# Altium PCB Power_Board_Gan_Cuk.PcbDoc (part 4 of 4)
Units mil, origin at the board's own origin, x right, y up, seen from the top; angles counter-clockwise.
Board outline 9910 x 8913.25 mil, 5 copper layers (Top Layer, Middle 1, HF Layer, Middle 4, Bottom Layer), stack 37.051 mil thick; 394 components, 188 nets, 1156 pads, 1424 vias.
Unrouted connection lines stored in the file: 6.
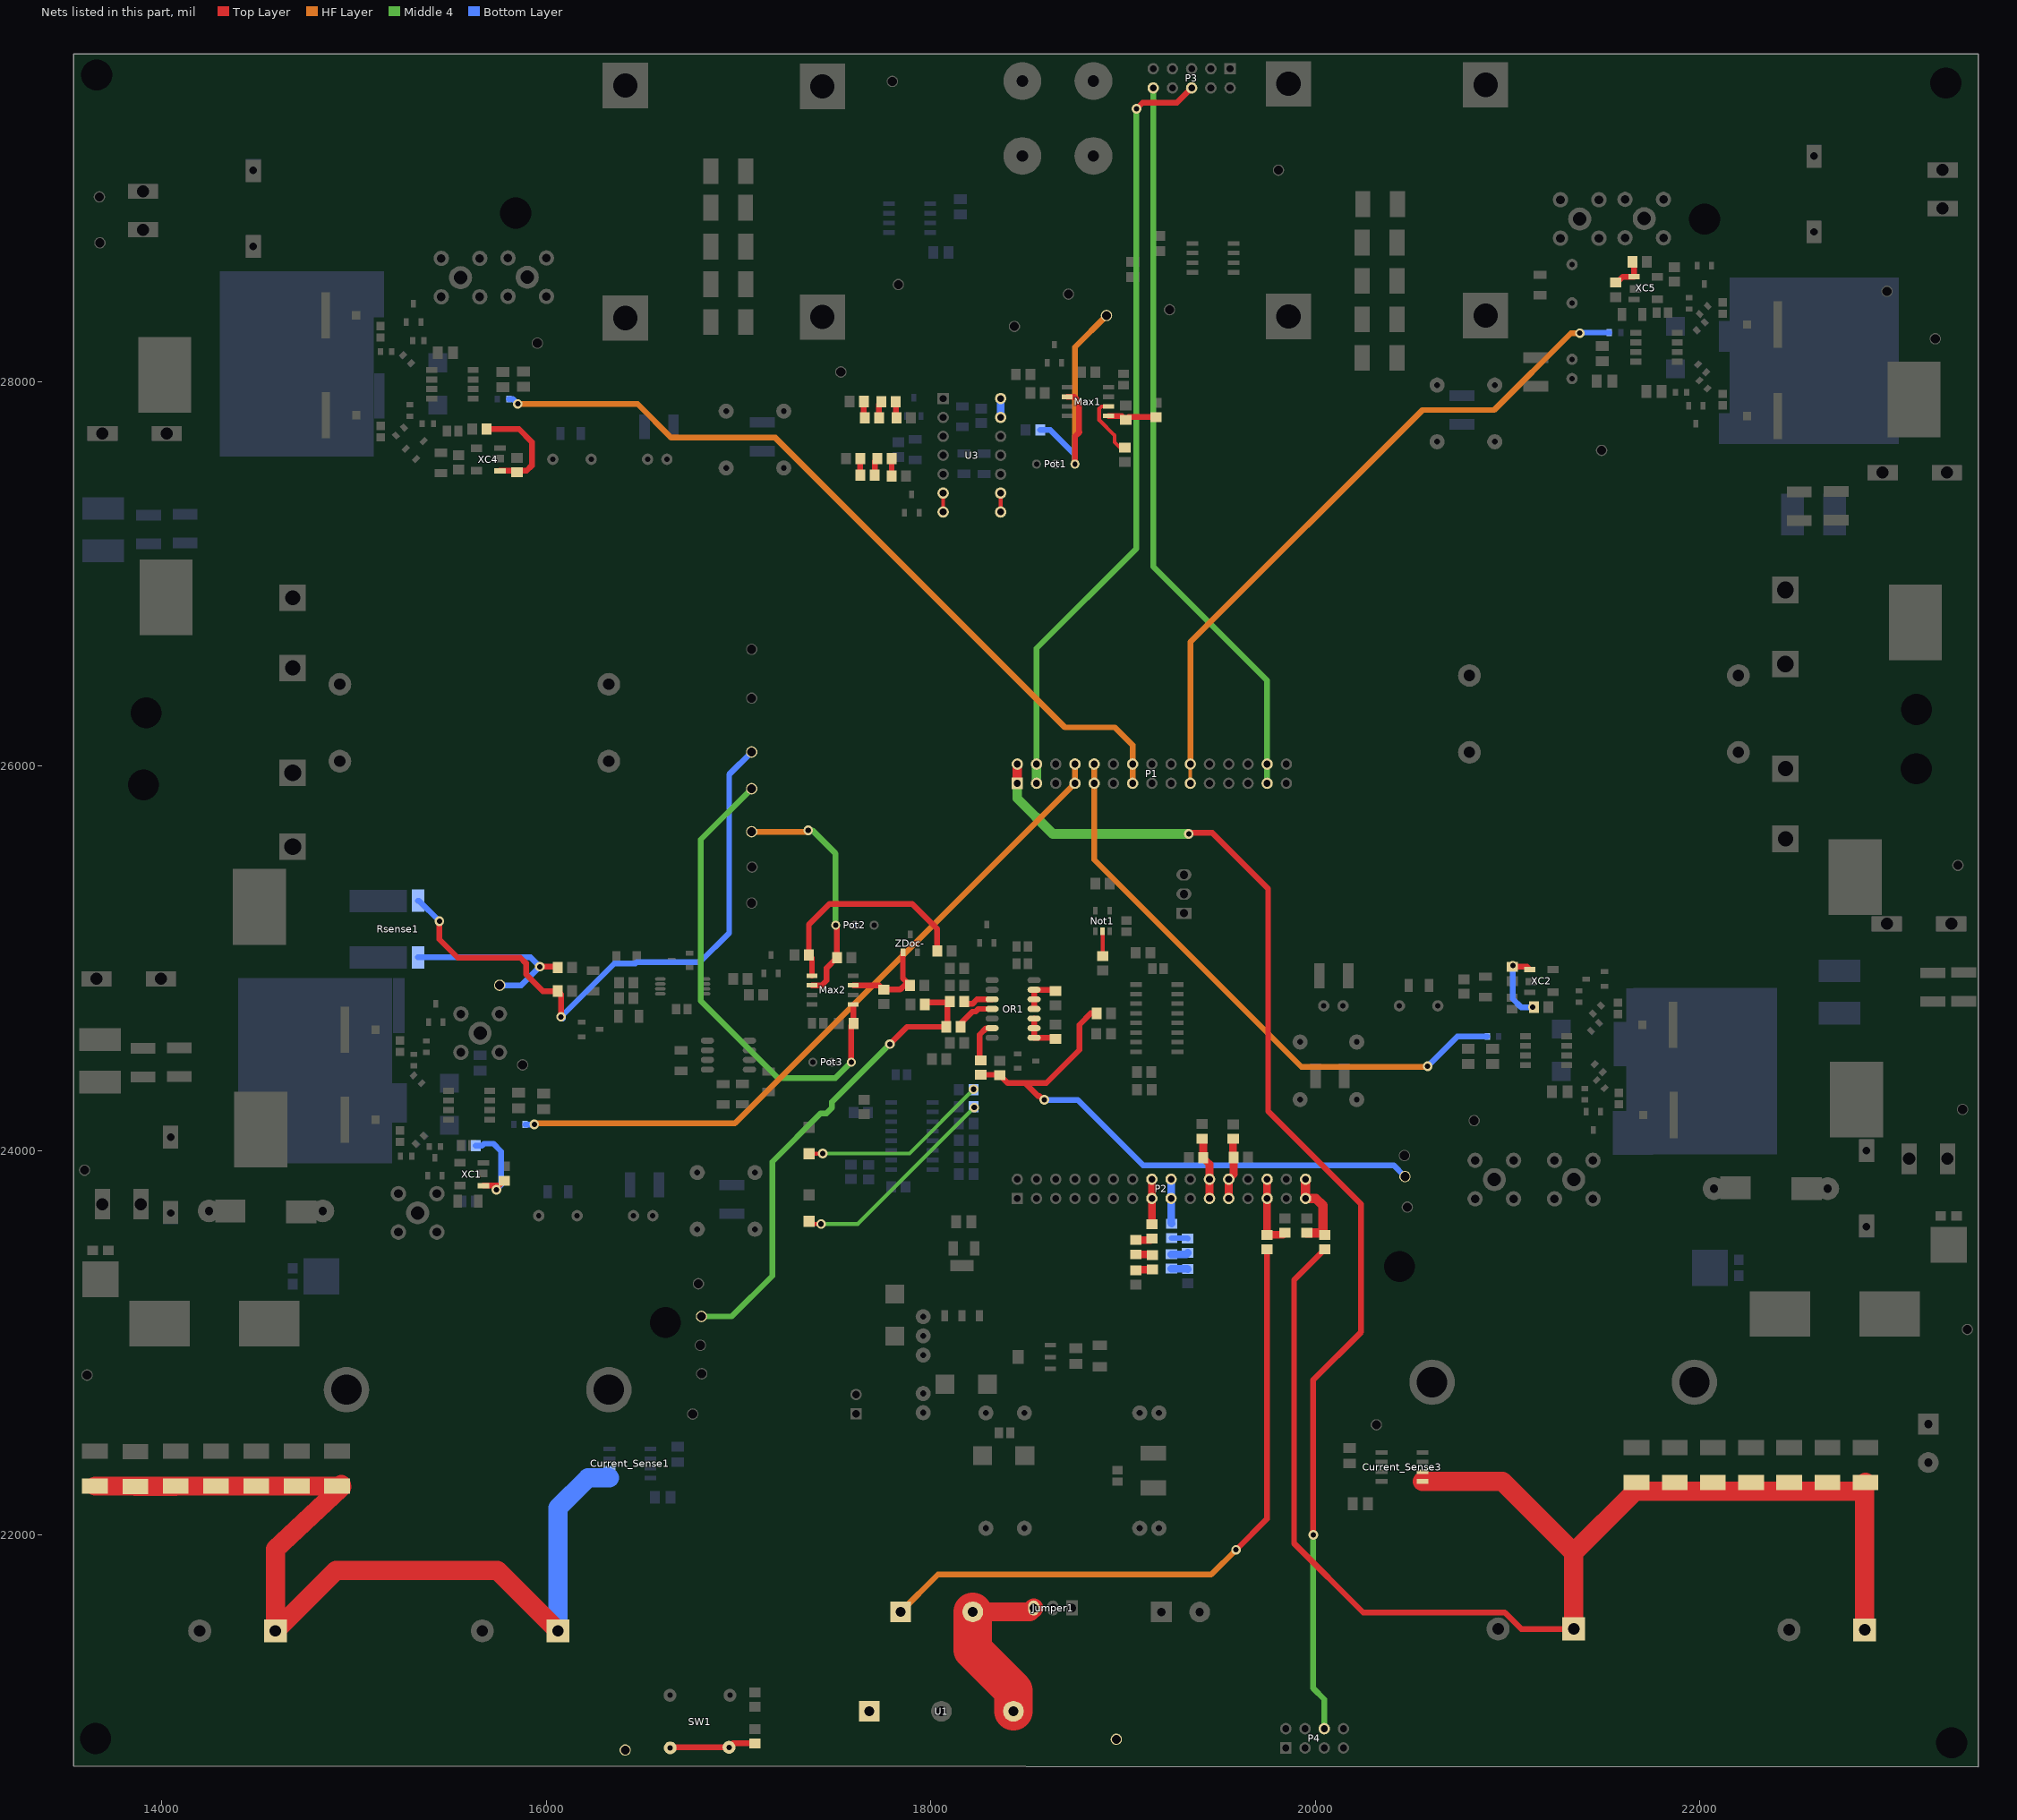
[diagram p7: the nets of this part, all layers, seen from the top]

## Via types
v1: diameter 15, hole 12, Top Layer to Bottom Layer, 976 vias
v2: diameter 50, hole 28, Top Layer to Bottom Layer, 343 vias
v3: diameter 35, hole 20, Top Layer to Bottom Layer, 74 vias
v4: diameter 35, hole 25, Top Layer to Bottom Layer, 30 vias
v5: diameter 100, hole 50, Top Layer to Bottom Layer, 1 vias

## Nets (pads, with @x,y where several pads share a name; then routed paths per layer and width w, separated by ;. In a path a pad name is that pad's centre, name@x,y a point inside that pad or via, vN(x,y) a via of type N, cw(c..) or ccw(c..) an arc to the next point about the centre after c; other vN are vias at no path point) (continued)
NetMax1_2: Max1.2 Pot1.1 R55.1 TP32.1 | length 1531.2
  Top Layer w30: Max1.2@18709.73,27920.98 18747.02,27920.98 18771,27897 18771,27737.6 18772.6,27736 18750,27713.4 Pot1.1@18750,27571
  HF Layer w30: Pot1.1@18750,27571 18750,28180 TP32.1@18914,28344
  Bottom Layer w30: R55.1@18568.4,27748 18621,27748 18750,27619 Pot1.1@18750,27571
NetMax1_5: Max1.5 R51.1 R73.2 | length 262.4
  Top Layer w30: Max1.5@18924.3,27820.98 18993.61,27820.98 R73.2@19014,27800.6 19029,27815.6 R51.1@19172,27815.6
NetMax1_6: Max1.6 Rl1.2 | length 327
  Top Layer w20: Max1.6@18924.3,27870.98 18887.98,27870.98 18875.76,27858.76 18875.76,27800.24 18956,27720 18956,27684 18983.6,27656.4 Rl1.2@19010,27656.4
NetMax2_1: Max2.1 R56.2 Rdev2.1 | length 1153.3
  Top Layer w30: Max2.1@17381.73,24908.98 17381.73,25000.67 Rdev2.1@17365.4,25017 17365.4,25174.4 17474,25283 17902,25283 18033.6,25151.4 R56.2@18033.6,25038
NetMax2_2: Max2.2 Pot2.1 R74.1 TP43.1 | length 1261
  Top Layer w30: Max2.2@17381.73,24858.98 17431.98,24858.98 17457,24884 17457,24948.4 R74.1@17511.6,25003 17511.6,25165.4 Pot2.1@17505,25172
  Middle 4 w30: v2(17362,25665) 17384,25665 17505,25544 Pot2.1@17505,25172
  HF Layer w30: TP43.1@17068,25658 17355,25658 v2(17362,25665)
NetMax2_5: Max2.5 Pot3.1 R78.1 TP44.1 | length 2502
  Top Layer w30: Pot3.1@17586,24459 17586,24649.6 R78.1@17597.4,24661 17597.4,24757.88 Max2.5@17596.3,24758.98
  Middle 4 w30: TP44.1@17068,25882 16803,25617 16803,24778 17204,24377 17504,24377 Pot3.1@17586,24459
NetMax2_7: Max2.7 R66.2 Rdev.2 ZDoc-.1 | length 502.1
  Top Layer w30: Max2.7@17596.3,24858.98 17732.42,24858.98 Rdev.2@17755,24836.4 17840.4,24836.4 17862,24858 R66.2@17892.6,24858 17854.6,24896 ZDoc-.1@17854.6,25029.76
NetNot1_2: Not1.2 NOTR.1 | length 129.9
  Top Layer w20: Not1.2@18893,25139.88 18894,25138.88 NOTR.1@18894,25010.4
NetOC_1: OC.1 R77.2 | length 1116.9
  Top Layer w20: OC.1@17366,23631.2 17380.2,23617 v2(17429,23617)
  Middle 4 w20: v2(17429,23617) 17620,23617 v2(18226,24223)
NetOR1_3: OR1.3 Roc1tot.1 | length 155.3
  Top Layer w30: Roc1tot.1@18173.4,24762 18216,24762 18240,24786 OR1.3@18318.75,24786
NetOR1_4: OR1.4 R71.1 | length 220.5
  Top Layer w30: R71.1@18156.4,24643 18155.4,24644 18146.4,24653 18155.2,24660.2 18217,24722 18232.57,24722 18246.57,24736 OR1.4@18318.75,24736
NetOR1_6: OR1.6 Rlatch1.1 | length 214.9
  Top Layer w30: Rlatch1.1@18260,24468.4 18254,24474.4 18254,24602 18288,24636 OR1.6@18318.75,24636
NetOR1_8: OR1.8 OR1.9 OR1.10 R92.1 | length 214.4
  Top Layer w30: OR1.10@18537.25,24686 OR1.9@18537.25,24636 OR1.8@18537.25,24586 18642.6,24586 R92.1@18649,24579.6
NetOR1_11: OR1.11 OR1.12 OR1.13 R91.1 | length 214.5
  Top Layer w30: OR1.11@18537.25,24736 OR1.12@18537.25,24786 OR1.13@18537.25,24836 18642.4,24836 R91.1@18649,24829.4
NetOV_1: OV.1 R75.2 | length 995.1
  Top Layer w20: OV.1@17367,23982.1 17436.1,23982.1 v2(17438,23984)
  Middle 4 w20: v2(17438,23984) 17889,23984 v2(18223,24318)
NetP1_1: P1.1 P1.2 P4.6 | length 6386.5
  Top Layer w30: v2(19342,25647) 19348,25653 19464,25653 19755,25362 19755,24204 20239,23720 20239,23055 19988,22804 19988,21997 v2(19990,21999)
  Top Layer w50: P1.1@18450,25910 P1.2@18450,26010
  Middle 4 w30: v2(19990,21999) 19990,21201 20047,21144 P4.6@20047,20991
  Middle 4 w50: P1.1@18450,25910 18450,25832 18635,25647 v2(19342,25647)
NetP1_3: P1.3 P1.4 P3.6 | length 4057.1
  Top Layer w30: v2(19070,29420) 19101,29451 19280,29451 P3.6@19357,29528
  Middle 4 w30: P1.4@18550,26010 18550,26612 19070,27132 v2(19070,29420)
  Middle 4 w50: P1.3@18550,25910 P1.4@18550,26010
NetP1_7: P1.7 P1.8 R21.2 | length 3702.7
  HF Layer w30: v2@15937,24128 v2(15937,24135) 15943,24141 16981,24141 P1.7@18750,25910 P1.8@18750,26010
  Bottom Layer w30: R21.2@15889.53,24135 v2(15937,24135)
NetP1_9: P1.9 P1.10 R31.2 | length 3054
  HF Layer w30: P1.10@18850,26010 P1.9@18850,25910 18850,25513 19928,24435 20582,24435 v2(20585,24438)
  Bottom Layer w30: v2(20585,24438) 20739,24592 R31.2@20895.47,24592
NetP1_13: P1.13 P1.14 R26.2 | length 4189.9
  HF Layer w30: v2(15851,27884) 16474,27884 16650,27708 17191,27708 18698,26201 18957,26201 19050,26108 P1.14@19050,26010 P1.13@19050,25910
  Bottom Layer w30: R26.2@15804.53,27910 15825,27910 v2(15851,27884)
NetP1_19: P1.19 P1.20 R36.2 | length 3581.8
  HF Layer w20: P1.19@19350,25910 P1.20@19350,26010
  HF Layer w30: P1.20@19350,26010 19350,26644 20558,27852 20931,27852 21331,28252 v2(21377,28252)
  Bottom Layer w30: v2(21377,28252) 21380,28255 R36.2@21530.47,28255
NetP1_27: P1.27 P1.28 P3.10 | length 3863.6
  Middle 4 w30: P3.10@19157,29528 19157,27037 19750,26444 P1.28@19750,26010 P1.27@19750,25910
NetP2_15: P2.15 P2.16 R2.2 | length 235
  Top Layer w40: P2.16@19150,23850 P2.15@19150,23750 19151,23749 R2.2@19151,23615.4
NetP2_17: P2.17 P2.18 R7.2 | length 232.8
  Bottom Layer w40: P2.18@19250,23850 P2.17@19250,23750 19250,23621.4 R7.2@19253,23618.4
NetP2_21: P2.21 P2.22 R13.1 R14.2 | length 327.3
  Top Layer w40: R13.1@19412,24061.6 19417.4,24056.2 R14.2@19417.4,23961 19450,23928.4 P2.22@19450,23850 P2.21@19450,23750
NetP2_23: P2.23 P2.24 R17.1 R20.2 | length 322.3
  Top Layer w40: P2.23@19550,23750 P2.24@19550,23850 19575.6,23875.6 R20.2@19575.6,23963 19573,23965.6 R17.1@19573,24060.6
NetP2_27: P2.27 P2.28 R1.1 R6.2 | length 387.2
  Top Layer w40: P2.28@19750,23850 P2.27@19750,23750 19749,23749 R1.1@19749,23560.4 19831.8,23560.4 R6.2@19842,23570.6
NetP2_31: P2.31 P2.32 R10.2 R12.1 | length 430.4
  Top Layer w50: P2.32@19950,23850 P2.31@19950,23750 20003,23750 20039.8,23713.2 20039.8,23570.6 R10.2@19957,23570.6
NetR2_1: R2.1 R3.2 | length 87
  Top Layer w40: R3.2@19067,23533.4 19143.8,23533.4 R2.1@19151,23540.6
NetR3_1: R3.1 R4.2 | length 87.7
  Top Layer w40: R3.1@19067,23458.6 19148.8,23458.6 R4.2@19153,23454.4
NetR4_1: R4.1 R5.2 | length 87.3
  Top Layer w40: R5.2@19067,23376.4 19070.2,23379.6 R4.1@19153,23379.6
NetR7_1: R7.1 R8.2 | length 83.9
  Bottom Layer w30: R7.1@19253,23543.6 19333.8,23543.6 R8.2@19336,23541.4
NetR8_1: R8.1 R9.2 | length 87
  Bottom Layer w40: R9.2@19252,23459.4 19328.8,23459.4 R8.1@19336,23466.6
NetR9_1: R9.1 R11.2 | length 85.9
  Bottom Layer w40: R9.1@19252,23384.6 19334.8,23384.6 R11.2@19337,23382.4
NetR41_2: R41.2 R43.1 XC1.4 | length 509.8
  Top Layer w30: XC1.4@15672.24,23816.93 15754.33,23816.93 ; v2(15740,23795) 15740,23802.6 15754.33,23816.93 ; R43.1@15780,23842.6 15754.33,23816.93
  Bottom Layer w30: R41.2@15632.4,24025 15665.15,24025 15675.15,24035 15724.85,24035 15765,23994.85 15765,23820 v2(15740,23795)
NetR44_2: R44.2 R46.1 XC2.4 | length 394.1
  Top Layer w30: R46.1@21028,24955.4 21101.43,24955.4 XC2.4@21115.76,24941.07 ; v2(21132,24745) R44.2@21137.6,24745
  Bottom Layer w30: v2(21028,24961) 21028,24788 21071,24745 v2(21132,24745)
NetR50_1: R50.1 SW1.1 | length 450.9
  Top Layer w30: SW1.1@16644,20891 16647,20894 SW1.1@16950,20894 16971,20915 R50.1@17085,20915
NetR57_1: R57.1 R58.2 | length 86.7
  Top Layer w30: R57.1@17651.4,27896 17651.4,27815.2 R58.2@17655.6,27811
NetR58_1: R58.1 R59.2 | length 89.5
  Top Layer w30: R58.1@17730.4,27811 17730.4,27881.8 R59.2@17743.6,27895
NetR59_1: R59.1 R60.2 | length 84.3
  Top Layer w30: R59.1@17818.4,27895 17818.4,27815.2 R60.2@17821.6,27812
NetR62_1: R62.1 R63.2 | length 85.2
  Top Layer w30: R62.1@17633,27599 17633,27514.6 R63.2@17633.6,27514
NetR63_1: R63.1 R64.2 | length 90.5
  Top Layer w30: R63.1@17708.4,27514 17708.4,27585.8 R64.2@17721.6,27599
NetR64_1: R64.1 R65.2 | length 90.1
  Top Layer w30: R64.1@17796.4,27599 17796.4,27509.2 R65.2@17796.6,27509
NetR70_1: R70.1 R71.2 Roc1tot.2 TP37.1 | length 2524.2
  Top Layer w30: v2(17787,24553) 17877,24643 R71.2@18079.6,24643 ; R70.1@17969.4,24759 17981,24770.6 18084,24770.6 18095.6,24759 18087,24759 R71.2@18087,24642
  Middle 4 w30: TP37.1@16807,23136 16964,23136 17175,23347 17175,23941 17426,24192 17456.71,24192 17486,24221.29 17486,24252 v2(17787,24553)
NetR72_2: R72.2 Rlatch1.2 Rlatch.2 TP39.1 | length 3026.6
  Top Layer w30: Rlatch1.2@18260,24393.6 18357,24393.6 R72.2@18359,24391.6 18399.6,24351 18490,24351 ; v2(18591,24263) 18585,24263 18564,24284 18557,24284 18490,24351 ; Rlatch.2@18863.6,24713 18832,24713 18773,24654 18773,24523 18601,24351 18490,24351
  Bottom Layer w30: v2(18591,24263) 18764,24263 19104,23923 20408,23923 TP39.1@20467,23864
NetR76_2: R76.2 Rsense1.3 TP40.1 | length 997.7
  Top Layer w30: v2(15966,24956) 16053.6,24956 R76.2@16058.6,24951
  Bottom Layer w30: Rsense1.3@15332,25004 15918,25004 v2(15966,24956) 15869,24859 TP40.1@15757,24859
NetR80_2: R80.2 Rsense1.4 TP45.1 | length 3211.5
  Top Layer w30: v2(15443,25193) 15443,25098 15538,25003 15865,25003 15894,24974 15894,24916 15981,24829 R80.2@16059.6,24829 16076,24812.6 v2(16076,24695)
  Bottom Layer w30: Rsense1.4@15332,25299.08 15336.92,25299.08 v2(15443,25193) ; v2@16085,24686 v2(16076,24695) 16354,24973 16463.29,24973 16469.29,24979 16799,24979 16951,25131 16951,25956 TP45.1@17068,26073
NetR85_2: R85.2 R87.1 XC4.4 | length 562.3
  Top Layer w30: R85.2@15689.4,27753 15857,27753 15924,27686 15924,27563 15896.93,27535.93 XC4.4@15758.24,27535.93
NetR88_2: R88.2 R90.1 XC5.4 | length 187.2
  Top Layer w30: R88.2@21564,28514.8 21569.8,28514.8 21600.99,28545.99 XC5.4@21658.13,28545.99 21658.13,28615.47 R90.1@21650.6,28623
NetU3_6: U3.6 U3.7 | length 98.4
  Top Layer w20: U3.7@18064,27321.45 U3.6@18064,27419.87
NetU3_8: U3.8 U3.9 | length 98.4
  Top Layer w20: U3.8@18363.21,27321.45 U3.9@18363.21,27419.87
NetU3_13: U3.13 U3.14 | length 98.4
  Bottom Layer w40: U3.13@18363.21,27813.57 U3.14@18363.21,27912
Vin1: C1.+ C2.+ C3.1 C4.1 C5.1 C6.1 C7.1 CIN1.1 CIN3.1 Current_Sense1.1 Current_Sense1.2 R1.2 TP1.1 U1.1 U2.1 | length 8417.9
  Top Layer w30: v2(19588,21922) 19749,22083 R1.2@19749,23485.6
  Top Layer w100: CIN1.1@13651,22253.42 13859.48,22253.42 CIN3.1@13861,22251.9 14069.48,22251.9 C3.1@14071,22253.42 C6.1@14281,22253.42 C5.1@14491,22253.42 C4.1@14701,22253.42 C7.1@14911,22253.42 C7.1@14922.42,22253.42 ; C7.1@14916.35,22247.72 14920.31,22251.44 C7.1@14922.42,22253.42 ; C7.1@14932,22262.42 C7.1@14922.42,22253.42 ; C7.1@14933,22253.42 C7.1@14922.42,22253.42 ; C7.1@14936.35,22250.72 14924.23,22239.33 14590,21925.42 C1.+@14590,21500 14905,21815 15745,21815 C2.+@16060,21500
  HF Layer w30: U2.1@17843,21599 18037,21793 19459,21793 v2(19588,21922)
  Bottom Layer w100: C2.+@16060,21500 16060,22140 16215.43,22295.43 Current_Sense1.1@16328.15,22295.43
Vin2: C8.+ C9.+ C10.1 C11.1 C12.1 C14.1 C15.1 CIN2.2 CIN4.2 Current_Sense3.1 Current_Sense3.2 Jumper1.3 R12.2 TP4.1 U1.3 U2.2 | length 7880.4
  Top Layer w20: Current_Sense3.1@20556.2,22277.8 Current_Sense3.1@20557.73,22277.8
  Top Layer w30: R12.2@20050,23485.6 19890,23325.6 19890,21955 20250,21595 20986.51,21595 21071.51,21510 C9.+@21345,21510
  Top Layer w100: U2.2@18218,21599 18515.06,21599 Jumper1.3@18535.21,21619.15 ; Current_Sense3.1@20557.73,22277.8 20974.2,22277.8 21345,21907 ; C9.+@21345,21510 21345,21907 ; 22817.52,22227 21665,22227 21345,21907 ; C8.+@22858.7,21505 22858.7,22268.18 CIN2.2@22863,22272.48
  Top Layer w200: U2.2@18218,21599 18218,21401 18429.8,21189.2 U1.3@18429.8,21081.85
pads on no net: 8.1 8.3 8.7 8.8 Latch1.13 Latch2.13 Max1.7 NMH1.15 Not1.1 ov1z.3 Pot1.3 Pot2.3 Pot3.3 Power1.9 Power1.11 T1.N T2.N U4.5 U5.5 ZD1.3 ZD2.3 ZD3.3 ZD4.3 ZD5.3 ZD6.3 ZD7.3 ZD8.3 ZD9.3 ZD10.3 ZD11.3 ZD12.3 ZD13.3 ZD14.3 ZDoc1.3 ZDoc-.3
copper on no net: | length 5
  Middle 1 w20: 19865.47,25860.47 19870.51,25860.47

## Polygon pours and split planes (outlines as drawn)
GND on Top Layer "GND_L01_P1026" (solid, pour order 1026): 23051,24035 23051,23748 23165,23634 23363,23634 23363,23700 23328,23735 23199,23735 23128,23806 23128,24035
GND_S2 on Top Layer "GND_S2_L01_P1024" (solid, pour order 1024): 21 vertices, not listed, extent 21623,27715 21963,28117
Net7_6 on Top Layer "NET7_6_L01_P1022" (solid, pour order 1022): 16797,24875 16797,24831 16911,24831 16911,24857 16893,24875
G1 on Top Layer "G1_L01_P774" (solid, pour order 774): 15371.67,24048.33 15330,24090 15330,24350 15360,24380 15385,24355 15385,24265 15425,24225 15520,24225 15520,24195 15415,24195 15395,24175 15395,24071.67
NetGaN1_S on Top Layer "NETGAN1_S_L01_P778" (solid, pour order 778): 15076.3,24764.69 15259.37,24764.69 15259.37,24609.17 15200.32,24609.17 15200.32,24290.31 15201.81,24291.81 15259.37,24291.81 15259.37,24136.3 15200.32,24136.3 15200.32,24018.19 15076.3,24018.19
GND_P1 on Top Layer "GND_P1_L01_P796" (solid, pour order 796): 15215,24127.5 15235,24127.5 15285,24127.5 15285,24080 15215,24080
GND_P1 on Top Layer "GND_P1_L01_P806" (solid, pour order 806): 15441,24467 15442,24468 15560,24468 15560,24298 15556,24294 15452,24294 15452,24296 15441,24307
NetCon2_4 on Top Layer "NETCON2_4_L01_P808" (solid, pour order 808): 15316,24056 15284,24024 15284,23946 15351,23946 15404,23999 15404,24038 15347,24038 15341,24032
NetCon1_4 on Top Layer "NETCON1_4_L01_P812" (solid, pour order 812): 15285,24451 15294,24460 15329,24460 15357,24488 15357,24524 15393,24524 15402,24515 15402,24408 15345,24408 15305,24368 15284,24389 15284,24404
GND on Top Layer "GND_L01_P820" (solid, pour order 820): 13564,22742 13562,22740 13562,22394 14975,22394 14996,22415 14996,22490 14636,22490 14590,22536 14590,22748 14589,22749
Vin1 on Top Layer "VIN1_L01_P822" (solid, pour order 822): 13552,22294 13554,22292 15705,22292 16441,22292 16441,20809 13776,20809 13756,20829 13754,20829 13754,21016 13552,21218
GND_S1 on Top Layer "GND_S1_L01_P826" (solid, pour order 826): 15115.72,27791.53 15115.72,27747 15182.72,27747 15182.72,27791.53
GND_S1 on Top Layer "GND_S1_L01_P828" (solid, pour order 828): 15112.72,28311.53 15112.72,28267 15178.72,28267 15178.72,28311.53
GND_S1 on Top Layer "GND_S1_L01_P830" (solid, pour order 830): 15401,27658 15401,27790 15400,27791 15480,27791 15480,27659 15476,27655 15400,27655
GND_S1 on Top Layer "GND_S1_L01_P832" (solid, pour order 832): 15331,28333 15561,28333 15562,28332 15562,28234 15370,28234 15367,28237
GND_S1 on Top Layer "GND_S1_L01_P834" (solid, pour order 834): 15439,28046 15381,28046 15381,28160 15348,28193 15348,28243 15462,28243 15463,28242 15459,28238 15459,28102 15439,28082
G3 on Top Layer "G3_L01_P840" (solid, pour order 840): 15257,27863 15238,27882 15238,28061 15241,28061 15301.5,28121.5 15326,28097 15326,28005 15354,27977 15437,27977 15437,27945 15436,27944 15355,27944 15316,27905 15316,27863
NetCon3_4 on Top Layer "NETCON3_4_L01_P842" (solid, pour order 842): 15267,27838 15267,27803 15230.5,27766.5 15265,27732 15349,27732 15349,27738 15369,27758 15369,27807 15329,27807 15313,27823 15313,27838
NetCon4_4 on Top Layer "NETCON4_4_L01_P844" (solid, pour order 844): 15178,28182 15178,28137 15205,28110 15250,28110 15250,28111 15321,28182 15321,28234 15274,28234 15222,28182
GND_SS1 on Top Layer "GND_SS1_L01_P856" (solid, pour order 856): 15100.32,27688.19 14969.11,27688.19 14968.81,28481.81 15158.27,28481.81 15158.27,28326.3 15099.21,28326.3 15099.21,27962.21 15159.37,27961.81 15159.37,27806.3 15100.32,27806.3
NetC21_1 on Top Layer "NETC21_1_L01_P866" (solid, pour order 866): 14761,26676 14901,26816 14901,27146 14862,27185 13620,27185 13584,27149 13584,26759 13667,26676
NetC21_2 on Top Layer "NETC21_2_L01_P868" (solid, pour order 868): 13585,27592 13585,29190 14062,29667 16616,29667 16616,29219 16355,28958 15030,28958 14869,28797 14869,27605 14765,27501 13648,27501 13613,27536
NetC01_1 on Top Layer "NETC01_1_L01_P876" (solid, pour order 876): 16278,28207 16278,28512 16719,28953 16719,29160 16769,29210 16885,29210 16908,29187 16908,28240 16875,28207
GND_S on Top Layer "GND_S_L01_P878" (solid, pour order 878): 16994,29197 16991,29194 16991,28237 17021,28207 17028,28214 17556,28214 17556,28594 17135,29015 17135,29192 17120,29207 17009,29207
GND on Top Layer "GND_L01_P884" (solid, pour order 884): 22281,22774 22281,22585 22273,22577 20923,22577 20907,22561 20907,22411 20919,22399 21573,22399 21589,22415 22935,22415 22935,22418 22958,22441 22958,22773
GND_P2 on Top Layer "GND_P2_L01_P888" (solid, pour order 888): 21315,25056 21315,24919 21298,24902 21297.31,24902.69 21247,24902.68 21247,24860.2 21306.79,24859.79 21361,24914 21540,24914 21540,25052 21534,25058
GND_P2 on Top Layer "GND_P2_L01_P890" (solid, pour order 890): 21543,24733 21598,24733 21598,24689 21593,24684 21543,24684
GND_P2 on Top Layer "GND_P2_L01_P894" (solid, pour order 894): 21540,24264 21602,24264 21602,24220 21597,24215 21540,24215
GND_P2 on Top Layer "GND_P2_L01_P896" (solid, pour order 896): 21119.56,24021.44 21111,24030 21111,24190 21258,24190 21285,24217 21285,24458 21288,24461 21331,24461 21331,24317 21434,24214 21434,24175 21394,24175 21365,24146 21365,24020.45
G5 on Top Layer "G5_L01_P902" (solid, pour order 902): 21280,24559 21365,24559 21405,24599 21405,24623 21427,24645 21431,24645 21475,24601 21475,24448 21451.5,24424.5 21429,24447 21429,24476 21376,24529 21280,24529
NetCon6_4 on Top Layer "NETCON6_4_L01_P904" (solid, pour order 904): 21441,24733 21441,24732 21502,24671 21502,24663 21479,24640 21460,24659 21429,24659 21424,24654 21397,24654 21381,24670 21381,24696 21420,24735
NetCon5_4 on Top Layer "NETCON5_4_L01_P906" (solid, pour order 906): 21390,24357 21391,24358 21391,24408 21476,24408 21496,24428 21518,24406 21518,24401 21452,24335 21408,24335
GND on Top Layer "GND_L01_P916" (solid, pour order 916): 20 vertices, not listed, extent 21555,23985 21743,24839
NetC30_2 on Top Layer "NETC30_2_L01_P926" (solid, pour order 926): 22170,25711 22964,25711 22964,25710 23082,25592 23082,25143 23216,25009 23402,25009 23438,24973 23438,24893 23143,24893 23142,24894 23141,24893 22264,24893 22172,24985
NetC30_1 on Top Layer "NETC30_1_L01_P930" (solid, pour order 930): 21 vertices, not listed, extent 21838,22658 23437,24804
Vin2 on Top Layer "VIN2_L01_P932" (solid, pour order 932): 23344,22194 23344,21186 22995,20837 20443,20837 20446,20840 20446,22257 20529,22340 20985,22340 21014,22311 21155,22311 22953,22311 23071,22193 23148,22193
GND_S2 on Top Layer "GND_S2_L01_P936" (solid, pour order 936): 22079,28378 22141,28378 22141,28334 22136,28329 22079,28329
GND_S2 on Top Layer "GND_S2_L01_P938" (solid, pour order 938): 22079,27901 22141,27901 22141,27857 22139,27855 22079,27855
G7 on Top Layer "G7_L01_P940" (solid, pour order 940): 21857,28189 21857,28219 21858,28220 21916,28220 21983,28287 21986,28287 22028,28245 22028,28105 21989,28066 21972,28083 21972,28169 21952,28189
NetCon7_4 on Top Layer "NETCON7_4_L01_P946" (solid, pour order 946): 22029,28284 22008,28305 21982,28305 21952,28335 21952,28358 21931,28358 21922,28367 21922,28395 21982,28395 22057,28320 22057,28312
NetCon8_4 on Top Layer "NETCON8_4_L01_P948" (solid, pour order 948): 22036,28075 21923,27962 21918,27962 21918,27927 21921,27924 21949,27924 21949,27934 22063.53,28048.53
GND_SS2 on Top Layer "GND_SS2_L01_P956" (solid, pour order 956): 22098.47,27684.19 22098.47,27839.7 22157.53,27839.7 22157.53,28159.47 22156.81,28160.19 22098.47,28160.19 22098.47,28315.7 22157.53,28315.7 22157.53,28433.81 22287.84,28433.81 22287.84,28426.84 22287.84,27690.49 22281.54,27684.19
NetC31_2 on Top Layer "NETC31_2_L01_P968" (solid, pour order 968): 19 vertices, not listed, extent 19713,27399 23390,29672
NetC31_1 on Top Layer "NETC31_1_L01_P970" (solid, pour order 970): 22375,26965 22373,26967 22373,27256 22423,27306 23236,27306 23391,27151 23391,26554 22686.99,26554 22375,26866.01
NetCurrent_Sense3_3 on Top Layer "NETCURRENT_SENSE3_3_L01_P976" (solid, pour order 976): 20516.79,22367.21 20457,22427 20457,22865 20548,22956 20679,22956 20750,22885 20750,22437 20677.4,22364.4
Vin1 on Top Layer "VIN1_L01_P980" (solid, pour order 980): 16380,21830 17758,21830 17913,21675 17913,20905 17821.29,20813.29 16380,20813.29
Vin2 on Top Layer "VIN2_L01_P982" (solid, pour order 982): 20486.2,22073.2 19789,21376 18365,21376 18279,21290 18279,20874 18301,20852 20749,20852 20968.74,21071.74
GND_S on Top Layer "GND_S_L01_P986" (solid, pour order 986): 20388,29000 20383,28995 20383,28047 20462,28047 20633,28218 20995,28218 20995,28219 21024,28248 21024,28523 20952,28523 20474,29001
NetC011_1 on Top Layer "NETC011_1_L01_P988" (solid, pour order 988): 19539,28632 19539,28385 19892,28032 20272,28032 20291,28051 20291,29010 20108,29010 19999,28901 19999,28632
GND on Top Layer "GND_L01_P994" (solid, pour order 994): 14934,25455 15277,25455 15292,25440 15290,25438 15290,25179 15261,25150 15260,25151 14943,25151 14921,25173 14921,25437
NetC20_1 on Top Layer "NETC20_1_L01_P998" (solid, pour order 998): 22 vertices, not listed, extent 13558,22595 15110,24840
NetC20_2 on Top Layer "NETC20_2_L01_P1000" (solid, pour order 1000): 13837,25575 13963,25701 14783,25701 14783,25695 14806,25672 14806,25105 14187,24486 13837,24486
NetGaN1_S on Middle 4 "NETGAN1_S_L04_P784" (solid, pour order 784): 15200,24020 15070,24020 15070,24765 15260,24765 15260,24610 15200,24610 15200,24295 15260,24295 15260,24135 15200,24135
GND_SS1 on Middle 4 "GND_SS1_L04_P862" (solid, pour order 862): 15100.1,27688.93 14968.9,27688.93 14968.6,28482.55 15158.06,28482.56 15158.06,28327.04 15099,28327.04 15099,27962.96 15159.16,27962.56 15159.16,27807.04 15100.1,27807.04
GND on Middle 4 "GND_L04_P922" (solid, pour order 922): 20 vertices, not listed, extent 21555.5,23986 21745.5,24840
GND_SS2 on Middle 4 "GND_SS2_L04_P962" (solid, pour order 962): 22097.63,27683.52 22097.63,27839.04 22156.69,27839.04 22156.69,28158.81 22155.97,28159.52 22097.63,28159.52 22097.63,28315.04 22156.69,28315.04 22156.69,28433.15 22287,28433.15 22287,28426.18 22287,27689.82 22280.7,27683.52
GND on Middle 4 "GND_L04_P1008" (solid, pour order 1008): 31 vertices, not listed, extent 13552,20809 18209,26041
GND on Middle 4 "GND_L04_P1012" (solid, pour order 1012): 33 vertices, not listed, extent 18014,20808.29 23439,26056
GND_SS1 on Middle 4 "GND_SS1_L04_P1016" (solid, pour order 1016): 19 vertices, not listed, extent 13586.55,26377.55 16617.55,29672.55
GND_SS2 on Middle 4 "GND_SS2_L04_P1020" (solid, pour order 1020): 27 vertices, not listed, extent 19708,26392.08 23401,29677.08
GND on Bottom Layer "GND_L05_P924" (solid, pour order 924): 22441,24843 22441,23985 21615,23985 21615,24843
GND_S2 on Bottom Layer "GND_S2_L05_P1046" (solid, pour order 1046): 21625,27715 21622,27718 21622,27852 21687,27917 21687,27981 21781,28075 21781,28109 21920,28109 21928,28101 21928,27746 21897,27715
GND_P2 on Bottom Layer "GND_P2_L05_P1042" (solid, pour order 1042): 21120,24022 21109,24033 21110,24034 21110,24232 21208,24330 21208,24459 21216,24461 21222,24461 21331,24461 21331,24319 21365,24283 21365,24253 21365,24025 21359,24019
GND on Bottom Layer "GND_L05_P1034" (solid, pour order 1034): 18 vertices, not listed, extent 20906,22397 22955,22776
GND on Bottom Layer "GND_L05_P1032" (solid, pour order 1032): 13561,22395 13561,22741 14569,22741 14590,22720 14587,22717 14587,22533 14590,22533 14635,22488 14989,22488 14989,22411 14975,22397 14961,22397
GND on Bottom Layer "GND_L05_P1030" (solid, pour order 1030): 14922,25437 14922,25443 14936,25457 15247,25457 15275,25429 15275,25176 15256,25157 14949,25157 14949,25162 14921,25190
GND_S1 on Bottom Layer "GND_S1_L05_P1028" (solid, pour order 1028): 15398,27649 15397,27650 15397,27777 15404,27784 15487,27784 15496,27775 15496,27661 15482,27647 15401,27647
G2 on Bottom Layer "G2_L05_P776" (solid, pour order 776): 15365,24055 15325,24095 15325,24350 15355,24380 15385,24350 15385,24315 15425,24275 15525,24275 15525,24245 15520,24240 15425,24240 15385,24200 15385,24075
GND_P1 on Bottom Layer "GND_P1_L05_P804" (solid, pour order 804): 15446,24346 15446,24466 15448,24468 15562,24468 15562,24366 15542,24346
NetCon2_4 on Bottom Layer "NETCON2_4_L05_P810" (solid, pour order 810): 15319,24058 15364,24013 15364,23977 15339,23952 15299,23952 15299,24037
Vin1 on Bottom Layer "VIN1_L05_P824" (solid, pour order 824): 13555,22286 16128,22286 16200,22358 16371,22358 16384,22345 16384,22256 16382,22256 16382,21167 16012.49,20797.49 14018.51,20797.49 13552,21264 13552,21325
GND_S1 on Bottom Layer "GND_S1_L05_P836" (solid, pour order 836): 15558,28159 15534,28159 15483,28108 15483,28051 15389,28051 15383,28062 15367,28096 15367,28333 15368,28334 15558,28334
NetCon4_4 on Bottom Layer "NETCON4_4_L05_P846" (solid, pour order 846): 15251,28116 15250,28116 15196,28170 15232,28206 15249,28206 15280,28175 15280,28145
G4 on Bottom Layer "G4_L05_P848" (solid, pour order 848): 15301,28124 15301,28123 15238,28060 15238,27879 15256,27861 15316,27861 15316,27945 15364,27993 15441,27993 15441,28031 15374,28031 15319.5,28085.5 15321,28087 15321,28105
NetCon3_4 on Bottom Layer "NETCON3_4_L05_P850" (solid, pour order 850): 15254,27835 15315,27835 15320,27830 15320,27791 15341,27770 15341,27736 15334,27729 15282,27729 15254,27757
GND_SS1 on Bottom Layer "GND_SS1_L05_P864" (solid, pour order 864): 15099.35,27689.96 14968.15,27689.96 14967.85,28483.58 15157.31,28483.58 15157.31,28328.07 15098.25,28328.07 15098.25,27963.98 15158.41,27963.98 15158.41,27808.07 15099.35,27808.07
GND_SS1 on Bottom Layer "GND_SS1_L05_P872" (solid, pour order 872): 15157.31,28484 14368,28484 14337,28453 14337,27702 14338,27702 14360,27680 15101,27680 15101,27806.42 15099.35,27808.07 15158.41,27808.07 15158.41,27963.98 15098.25,27963.98 15098.25,28328.07 15157.31,28328.07
NetC21_1 on Bottom Layer "NETC21_1_L05_P874" (solid, pour order 874): 13597.3,27188.3 13586,27177 13586,27066 13948,26704 14117,26704 14192,26779 14192,27187.32
NetCsnub2_2 on Bottom Layer "NETCSNUB2_2_L05_P882" (solid, pour order 882): 22246,23267 22248,23269 22567,23269 22567,23038 22557,23028 22243,23028 22228,23043 22228,23251
NetCon5_4 on Bottom Layer "NETCON5_4_L05_P908" (solid, pour order 908): 21391,24408 21471,24408 21493,24430 21503,24430 21503,24429 21521,24411 21521,24401 21519,24401 21453,24335 21408,24335 21408,24339 21391,24356
NetCon6_4 on Bottom Layer "NETCON6_4_L05_P910" (solid, pour order 910): 21393,24708 21420,24735 21437,24735 21502,24670 21502,24661 21481,24640 21462,24659 21429,24659 21428,24660 21422,24654 21406,24654 21400,24660 21381,24660 21381,24695 21380,24696
G6 on Bottom Layer "G6_L05_P912" (solid, pour order 912): 21278,24510 21349,24510 21393,24554 21393,24611 21427,24645 21431,24645 21476,24600 21476,24448 21475,24448 21450.5,24423.5 21399,24475 21282,24475 21278,24479
GND on Bottom Layer "GND_L05_P914" (solid, pour order 914): 20 vertices, not listed, extent 21553,23985 21743,24839
GND_SS2 on Bottom Layer "GND_SS2_L05_P934" (solid, pour order 934): 22097.94,27684.07 22916.75,27684.07 22964.25,27731.57 22964.25,28502.57 22928.25,28538.57 22154.25,28538.57 22154.25,28361.65 22154.25,28316 22096.84,28316 22096.84,28160 22157,28160 22157,27840 22097.94,27840
G8 on Bottom Layer "G8_L05_P942" (solid, pour order 942): 21855,28171 21856,28170 21933,28170 21963,28200 21963,28269 21982,28288 22028,28242 22028,28104 21989,28065 21968,28086 21968,28117 21947,28138 21855,28138
NetCon7_4 on Bottom Layer "NETCON7_4_L05_P944" (solid, pour order 944): 22029,28284 22020,28284 21995,28309 21977,28309 21958,28328 21958,28338 21982,28362 22001,28362 22054,28309
NetCon8_4 on Bottom Layer "NETCON8_4_L05_P950" (solid, pour order 950): 22035,28076 21984,28025 21984,28013 22002,27995 22059,28052 22060,28052
GND_SS2 on Bottom Layer "GND_SS2_L05_P964" (solid, pour order 964): 22100.63,27685.52 22100.63,27841.04 22159.69,27841.04 22159.69,28160.81 22158.97,28161.52 22100.63,28161.52 22100.63,28317.04 22159.69,28317.04 22159.69,28435.15 22290,28435.15 22290,28428.18 22290,27691.82 22283.7,27685.52
NetCurrent_Sense1_3 on Bottom Layer "NETCURRENT_SENSE1_3_L05_P978" (solid, pour order 978): 16311.06,22380 16264,22405 16166,22503 16166,22851 16258,22943 16374,22943 16439,22878 16439,22446.84 16360.57,22380
NetC01_1 on Bottom Layer "NETC01_1_L05_P990" (solid, pour order 990): 17670.46,28740.89 17633.66,28733.53 17747,28842 17832,28842 17847,28827 17847,28625 17779,28557 17630,28557
NetCurrent_Sense2_3 on Bottom Layer "NETCURRENT_SENSE2_3_L05_P992" (solid, pour order 992): 17686,29036 17686,28878 17703,28861 17840,28861 17863,28884 17863,28979
NetCsnub1_2 on Bottom Layer "NETCSNUB1_2_L05_P1002" (solid, pour order 1002): 14705,23438 14705,23047 14665,23007 14438,23007 14415,23030 14415,23201 14652,23438
NetC21_2 on Bottom Layer "NETC21_2_L05_P1004" (solid, pour order 1004): 13865,27278 13865,27786 13925,27846 14085,27846 14185,27746 14185,27277
NetGaN1_S on Middle 1 "NETGAN1_S_L02_P780" (solid, pour order 780): 15200,24020 15070,24020 15070,24765 15260,24765 15260,24610 15200,24610 15200,24290 15260,24290 15260,24135 15200,24135
GND_P1 on Middle 1 "GND_P1_L02_P798" (solid, pour order 798): 15215,24127.5 15235,24127.5 15285,24127.5 15285,24080 15215,24080
GND_P1 on Middle 1 "GND_P1_L02_P800" (solid, pour order 800): 15215,24595 15285,24595 15285,24550 15215,24550
GND_P1 on Middle 1 "GND_P1_L02_P802" (solid, pour order 802): 28 vertices, not listed, extent 15184,23536 16287,24792
GND on Middle 1 "GND_L02_P816" (solid, pour order 816): 15629,24335.91 15629,24148 15660,24117 15774,24117 15864,24027 16207,24027 16365,23869 16365,23532 17165,23532 17187,23554 17187,23997 16500,23997 16158.62,24338.38
GND on Middle 1 "GND_L02_P818" (solid, pour order 818): 20 vertices, not listed, extent 13554,20800 16444,26040
GND_S1 on Middle 1 "GND_S1_L02_P852" (solid, pour order 852): 33 vertices, not listed, extent 15116,27429 16293,28697
GND on Middle 1 "GND_L02_P854" (solid, pour order 854): 15600,28113 15548,28061 15548,27918 15596,27870 16303,27870 16414,27759 16414,27470 16446,27438 17249,27438 17319,27508 17319,27895 17226,27988 15990,27988 15990,28113
GND_SS1 on Middle 1 "GND_SS1_L02_P858" (solid, pour order 858): 15100.1,27687.98 14968.9,27687.98 14968.6,28481.6 15158.06,28481.6 15158.06,28326.09 15099,28326.09 15099,27962 15159.16,27961.6 15159.16,27806.09 15100.1,27806.09
GND_SS1 on Middle 1 "GND_SS1_L02_P870" (solid, pour order 870): 25 vertices, not listed, extent 13584,26374 17600,29672
GND on Middle 1 "GND_L02_P880" (solid, pour order 880): 16434,22080 16765,22080 17296,21549 17296,20809 16444,20809 16372,20881
GND_P2 on Middle 1 "GND_P2_L02_P892" (solid, pour order 892): 21598,24733 21598,24690 21592,24684 21535,24684 21535,24728 21540,24733
GND_P2 on Middle 1 "GND_P2_L02_P898" (solid, pour order 898): 34 vertices, not listed, extent 20371,23679 21602,25059
GND on Middle 1 "GND_L02_P900" (solid, pour order 900): 17 vertices, not listed, extent 19830,24178 21167,25044
GND on Middle 1 "GND_L02_P918" (solid, pour order 918): 20 vertices, not listed, extent 21554,23986 21744,24840
GND_S2 on Middle 1 "GND_S2_L02_P952" (solid, pour order 952): 30 vertices, not listed, extent 21107,27715 22142,29004
GND on Middle 1 "GND_L02_P954" (solid, pour order 954): 20574,27630 20575,27631 20985,27631 20985,27694 21167,27876 21557,27876 21612,27975 21740,28103 21740,28265 21737,28265 21723,28279 21164,28279 20922,28037 20570,28037
GND_SS2 on Middle 1 "GND_SS2_L02_P958" (solid, pour order 958): 22097.94,27684.6 22097.94,27840.11 22157,27840.11 22157,28159.89 22156.28,28160.6 22097.94,28160.6 22097.94,28316.11 22157,28316.11 22157,28434.22 22287.31,28434.22 22287.31,28427.26 22287.31,27690.9 22281.02,27684.6
GND_SS2 on Middle 1 "GND_SS2_L02_P972" (solid, pour order 972): 19 vertices, not listed, extent 19713,26389 23397,29672
GND on Middle 1 "GND_L02_P974" (solid, pour order 974): 23 vertices, not listed, extent 20438,20836 23439,26058
GND on Middle 1 "GND_L02_P984" (solid, pour order 984): 16747,22082 17047,21782 20175,21782 20429,22036 20582,21883 20582,20831 17225,20831 17215,20841
GND on Middle 1 "GND_L02_P996" (solid, pour order 996): 36 vertices, not listed, extent 15931,21973 20821,28247
GND_S2 on HF Layer "GND_S2_L03_P1048" (solid, pour order 1048): 30 vertices, not listed, extent 21107,27715 22142,29004
GND_P2 on HF Layer "GND_P2_L03_P1044" (solid, pour order 1044): 33 vertices, not listed, extent 20371.5,23678.5 21601.5,25058.5
GND_P1 on HF Layer "GND_P1_L03_P1038" (solid, pour order 1038): 28 vertices, not listed, extent 15184,23535.5 16287,24791.5
GND_S1 on HF Layer "GND_S1_L03_P1036" (solid, pour order 1036): 41 vertices, not listed, extent 15113,27429 16293,28703
NetGaN1_S on HF Layer "NETGAN1_S_L03_P782" (solid, pour order 782): 15260,24765 15070,24765 15070,24025 15075,24020 15200,24020 15200,24135 15260,24135 15260,24295 15200,24295 15200,24610 15260,24610
GND_SS1 on HF Layer "GND_SS1_L03_P860" (solid, pour order 860): 15100.1,27687.98 14968.9,27687.98 14968.6,28481.6 15158.06,28481.6 15158.06,28326.09 15099,28326.09 15099,27962 15159.16,27962 15159.16,27806.09 15100.1,27806.09
GND on HF Layer "GND_L03_P920" (solid, pour order 920): 20 vertices, not listed, extent 21555,23986 21745,24840
GND_SS2 on HF Layer "GND_SS2_L03_P960" (solid, pour order 960): 22098.94,27684.6 22098.94,27840.11 22158,27840.11 22158,28159.89 22157.28,28160.6 22098.94,28160.6 22098.94,28316.11 22158,28316.11 22158,28434.22 22288.31,28434.22 22288.31,28427.26 22288.31,27690.9 22282.02,27684.6
GND on HF Layer "GND_L03_P1006" (solid, pour order 1006): 31 vertices, not listed, extent 13550,20809 18207,26041
GND on HF Layer "GND_L03_P1010" (solid, pour order 1010): 33 vertices, not listed, extent 18016,20810.29 23441,26058
GND_SS1 on HF Layer "GND_SS1_L03_P1014" (solid, pour order 1014): 19 vertices, not listed, extent 13583,26377 16614,29672
GND_SS2 on HF Layer "GND_SS2_L03_P1018" (solid, pour order 1018): 27 vertices, not listed, extent 19708,26389 23401,29674

## Silkscreen, mask and mechanical layers (free items; w line width, h text height)
Top Overlay:
  lines w20: 21369,29321 21453.5,29484.5 21617,29321 21369,29321
  text "DANGER" at 15544,30061 h125
  text "HIGH VOLTAGE" at 15758,30000 h60
  text "1" at 20050,29534 h60
  text "4" at 20656,29522 h60
  text "1" at 16600,29520 h60
  text "4" at 17249,29520 h60
  text "DANGER" at 21189,29516 h125
  text "!" at 21438,29345 h60
  text "HIGH VOLTAGE" at 21179,29211 h60
  text "3" at 20887,28499 h60
  text "2" at 19842,28493 h60
  text "2" at 16552,28364 h60
  text "3" at 17255,28364 h60
  text "OC TEST POINTS" at 16961,25446 h90 r90
  text "+" at 23370,22625 h60
  text "Aux" at 18715,21505 h30
  text "Vin" at 18485,21500 h30
  text "+" at 18745,20915 h60
  text "-" at 19240,20905 h60
  text "Vin1" at 17455,20875 h60 r90
  text "Vin2" at 18755,20863.94 h60 r90
Bottom Overlay:
  circle w10: c16305,22285 r10.31
Mechanical 1:
  lines w10: 23415,29700 23446,29700 ; 23417.08,29699.97 13544,29706.94 13544,20797 23446,20797 23446,29695
  lines w20: 13682.06,23186.54 13682.43,23186.16 ; 13761,29261 16107,29261 16107,28325 ; 15604,26916 21616,26916 21616,29358 23383,29358 ; 15618,26925 15618,27528.75 15629.23,28322.08 ; 15629,28323 16100,28323 ; 15778,25165 15778,23438 16813,23438 ; 20015,22987 23411,22987 ; 20021,23683 21025,23683 ; 23383.52,29348.18 23411.34,22993.93
  lines w30: 13755,22531 16814,22531 16814,23430 ; 15779,25178 21021,25178 21021,23691 ; 20021,22986 20021,23683
  lines w40: 13755,22531 13755,29249

## Text inside footprints (layer, text, board x,y; h text height)
C106: Top Overlay "+" at 17696,22635 h60 r90; Top Overlay "-" at 17691,22700 h60 r90
P1: Top Overlay "30" at 19910,25990 h50; Top Overlay "29" at 19910,25890 h50; Top Overlay "2" at 18350,25990 h50; Top Overlay "1" at 18350,25890 h50
P2: Top Overlay "32" at 20010,23830 h50; Top Overlay "31" at 20010,23730 h50; Top Overlay "1" at 18350,23730 h50; Top Overlay "2" at 18350,23830 h50
P3: Top Overlay "1" at 19637,29648 h50 r180; Top Overlay "2" at 19657,29548 h50 r180
P4: Top Overlay "2" at 19747,20971 h50; Top Overlay "1" at 19767,20871 h50; Top Overlay "7" at 20207,20871 h50; Top Overlay "8" at 20207,20971 h50
T1: Top Overlay "1" at 14574.88,25565 h60 r90; Top Overlay "2" at 14574.88,25945 h60 r90; Top Overlay "3" at 14579.88,26490 h60 r90; Top Overlay "4" at 14584.88,26865 h60 r90
T2: Top Overlay "4" at 22542,26941 h60 r270; Top Overlay "3" at 22547,26546 h60 r270; Top Overlay "2" at 22547,26001 h60 r270; Top Overlay "1" at 22542,25631 h60 r270